# Altium PCB pcb_case_top_A_x1_1_5mm.PcbDoc
Units mm, origin at the board's own origin, x right, y up, seen from the top; angles counter-clockwise.
Board outline 46.89 x 20.32 mm, 2 copper layers (Top Layer, Bottom Layer), stack 1.571 mm thick; 10 components, 10 nets, 34 pads, 0 vias.
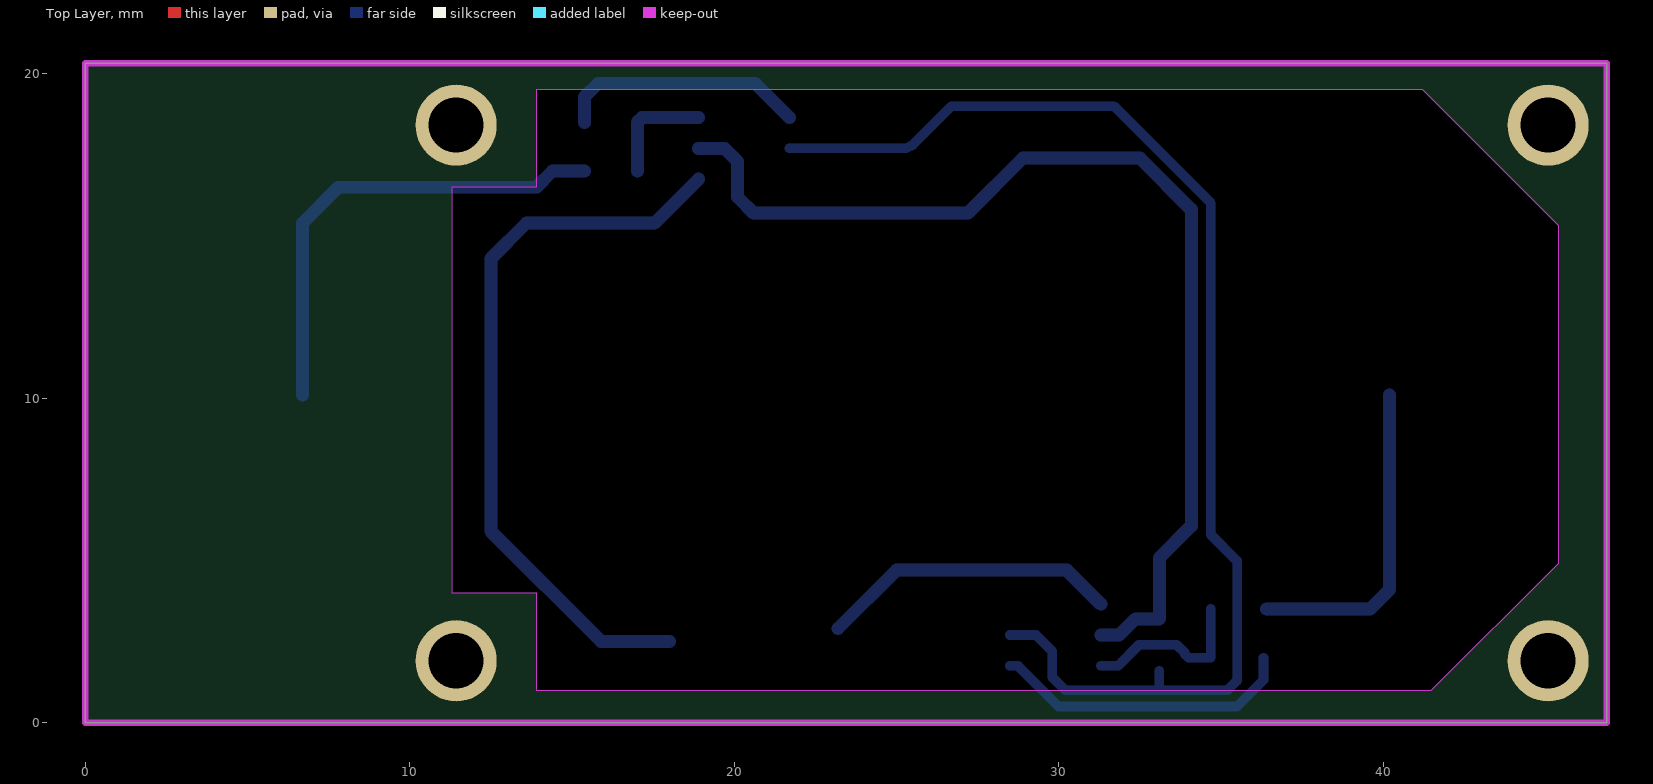
[diagram p0: Top Layer view]
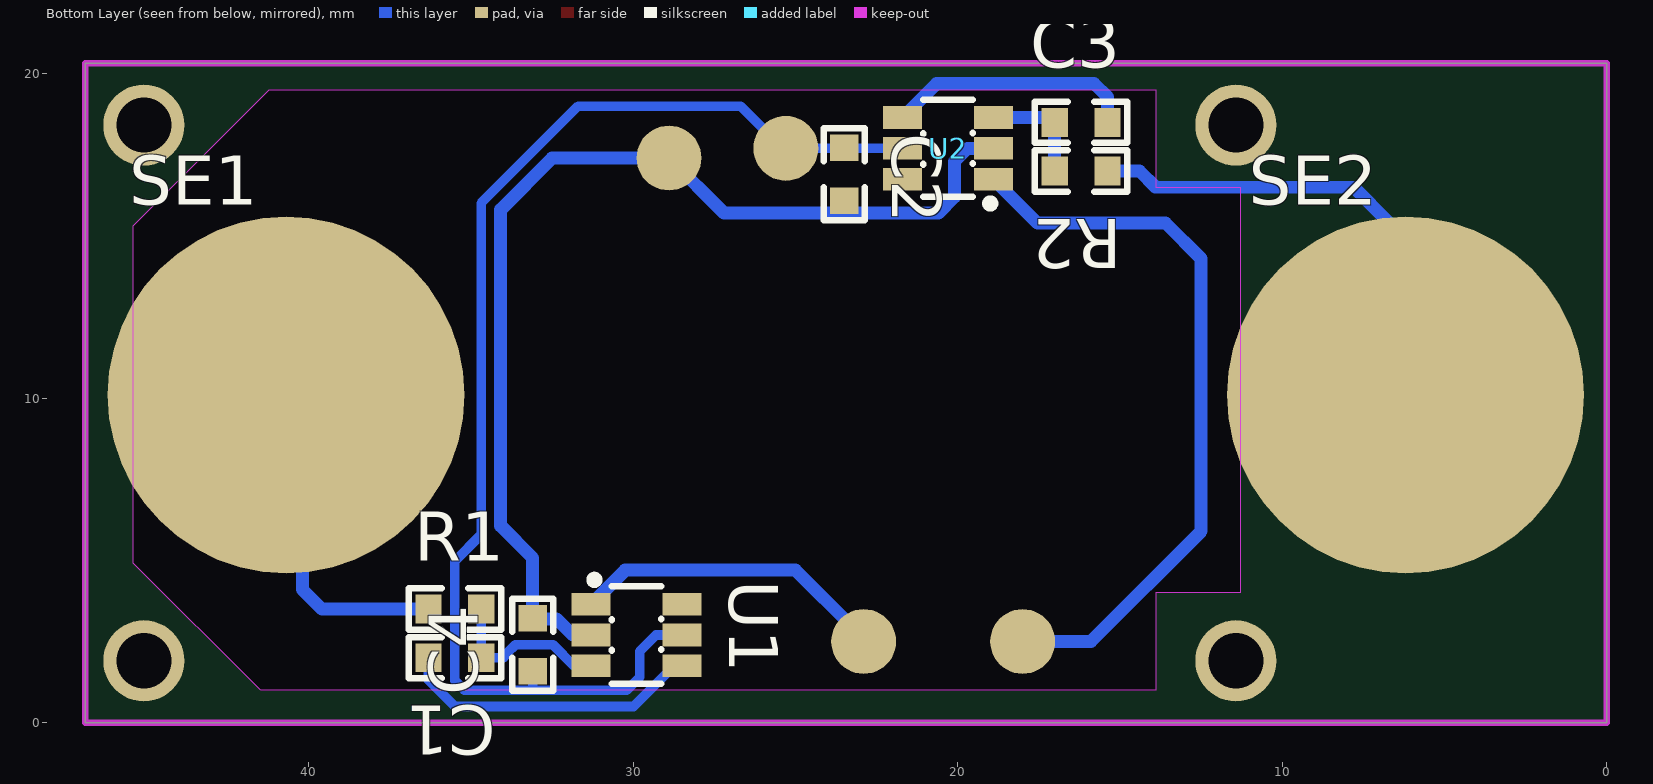
[diagram p1: Bottom Layer view, seen from below]
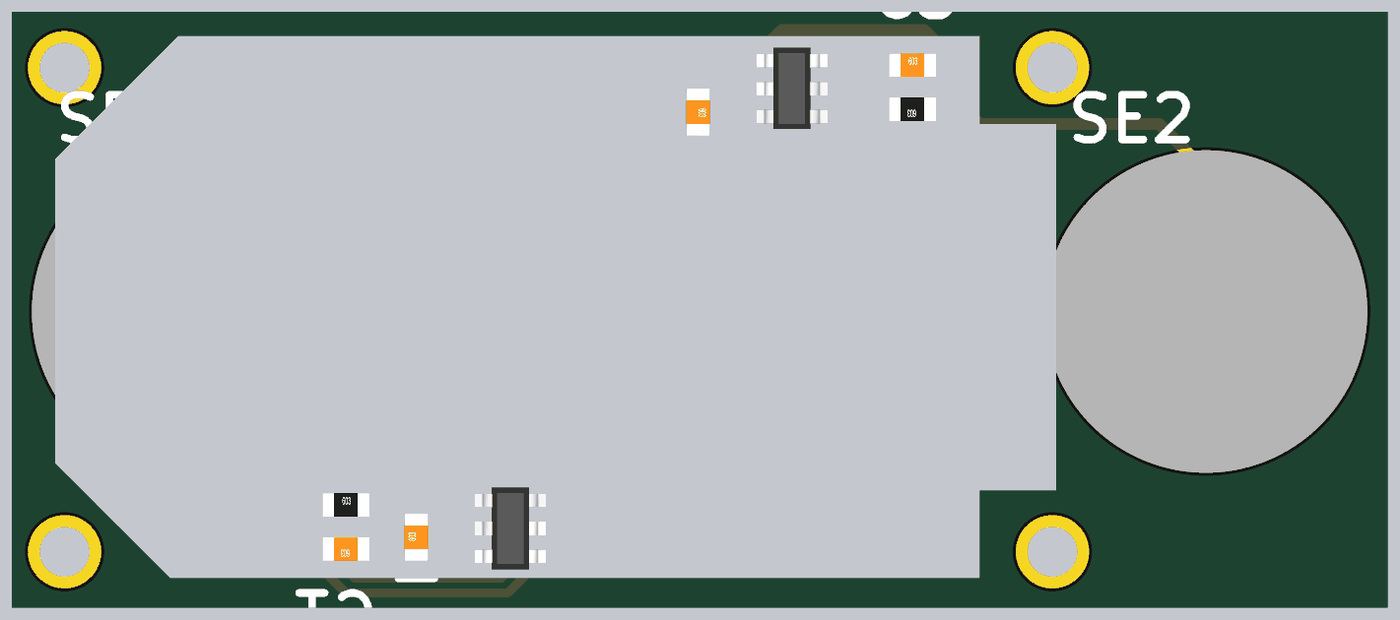
[diagram p2: 3D render of the assembled board from below, using the file's embedded part models]

## Layer stack, top to bottom
Top Solder: solder mask 0.0102, Solder Resist, Dk 3.5
Top Layer: signal copper 0.0356
Dielectric1: dielectric 1.5, FR-4, Dk 4.8
Bottom Layer: signal copper 0.0356
Bottom Solder: solder mask 0.0102, Solder Resist, Dk 3.5

## Board outline
0,0 46.89,0 46.89,20.32 0,20.32
cut-out: 11.3,4 13.9,4 13.9,1 41.49,1 45.405,4.915 45.405,15.315 41.22,19.5 13.9,19.5 13.9,16.5 11.3,16.5

## Design rules (kind name [scope] priority, off if disabled: settings)
Clearance [All] p1: gap=0.2
FabricationTestPointUsage TestPointUsage [All] p1: valid=0 allowmultiple=FALSE
FabricationTestpoint Testpoint [All] p1: side=3 testpointundercomponent=TRUE minsize=1.016 maxsize=2.54 preferedsize=1.524 minholesize=0 maxholesize=1.016 preferedholesize=0.813 testpointgrid=0.025 allowsidetop=TRUE allowsidebottom=TRUE usegrid=TRUE gridtolerance=0
PolygonConnect [All] p1: connectstyle=Relief reliefconductorwidth=0.4 reliefentries=4 polygonreliefangle="90 Angle" airgapwidth=0.3
RoomDefinition sch_qtouch [InComponentClass('sch_qtouch')] p1: confinementstyle=ConfineIn formatcopy=TRUE lockcomponents=FALSE outline -63.5,-34.646 179.172,-34.646 179.172,57.963 -63.5,57.963
RoutingVias [All] p1: holewidth=0.711 width=1.27 viastyle="Through Hole" minholewidth=0.711 minwidth=1.27 maxholewidth=0.711 maxwidth=1.27
SolderMaskExpansion [All] p1: expansion=0.102
Width [All] p1: maxlimit=0.4 minlimit=0.25 preferedwidth=0.4 minimp=50.000000 maximp=50.000000 favimp=50.000000
28 further rules are at their usual default settings.

## Components (designator, comment, footprint, x,y, rotation, side; value= is the part's Value field where it differs from the comment)
C1 "2n2" C0603 35.5,2 r0 bottom
C2 "100n" C0603 23.5,16.9 r270 bottom
C3 "2n2" C0603 16.2,18.5 r180 bottom
C4 "100n" C0603 33.1,2.4 r90 bottom
R1 "10k" R0603 35.5,3.5 r180 bottom
R2 "10k" R0603 16.2,17 r0 bottom
SE1 "Sense Electrode" SNS_EL_CIRC_1cm 40.7,10.1 r180 bottom
SE2 "Sense Electrode" SNS_EL_CIRC_1cm 6.2,10.1 r180 bottom
U1 "AT42QT1010-TSHR" SOT-23-6 29.9,2.7 r270 bottom
U2 "AT42QT1010-TSHR" SOT-23-6 20.3,17.7 r90 bottom

## Footprints (in the part's own frame and the unit in brackets; to place one, negate y for a bottom-side part, rotate by r counter-clockwise, add the part's x,y. Pads: shape width x height; smd on the part's side, far side on the other; paste and mask are expansions set on the pad)
C0603 [mil]
  rect 32x35 smd: 1(32,0) 2(-32,0)
  silkscreen extent -56,-25 56,25, body extent -31,-16 31,16, height 12
R0603 [mil]
  rect 32x35 smd: 1(32,0) 2(-32,0)
  silkscreen extent -56,-25 56,25, body extent -31,-16 31,16, height 12
SNS_EL_CIRC_1cm [mm] "Sense Electrode, Circle, 1cm Diameter"
  round 11 smd: 1(0,0)
SOT-23-6 [mm] ", AKA: SOT753 (NXP), TSOP5 (NXP)"
  rect 0.7x1.2 smd: 1(-0.95,-1.4) 2(0,-1.4) 3(0.95,-1.4) 4(0.95,1.4) 5(0,1.4) 6(-0.95,1.4)
  silkscreen extent -1.82,-1.43 1.5,0.76, body extent -1.4,-1.21 1.4,1.21, height 1.09

## Part data
C1 C2 C3 C4: library part Cap, "Capacitor"
R1 R2: library part Res, "Resistor"
SE1 SE2: library part _SNS_EL_CIRC_1cm, "Circular (1cm Diameter) Sense Electrode"
U1 U2: "Atmel Single-key QTouch Touch Sensor IC"

## Free pads (board coordinates)
  round 2 smd far side: 1(18,2.5) 1(22.9,2.5) 1(25.3,17.7) 1(28.9,17.4)
  round 2.5 hole 1.7: 4(11.43,1.905) 4(11.43,18.415) 4(45.085,1.905) 4(45.085,18.415)

## Nets (pads, with @x,y where several pads share a name; then routed paths per layer and width w, separated by ;. In a path a pad name is that pad's centre, name@x,y a point inside that pad or via, vN(x,y) a via of type N, cw(c..) or ccw(c..) an arc to the next point about the centre after c; other vN are vias at no path point)
GND: C2.1 C4.1 pad.1@28.9,17.4 U1.2 U2.2 | length 33
  Bottom Layer w0.4: U2.2 19.7,17.7 20.1,17.3 20.1,16.2 20.6,15.7 27.2,15.7 28.9,17.4 32.5,17.4 34.09,15.81 34.09,6.064 33.1,5.074 C4.1 33.087,3.2 32.366,3.2 31.866,2.7 U1.2
NetC1_1: C1.1 U1.4 | length 9.4
  Bottom Layer w0.3: U1.4 28.743,1.75 29.993,0.5 35.5,0.5 36.313,1.313 C1.1
NetC1_2: C1.2 R1.1 U1.3 | length 5.3
  Bottom Layer w0.3: U1.3 31.828,1.75 32.478,2.4 33.633,2.4 33.894,2.139 33.894,2.106 34,2 C1.2 R1.1
NetC3_1: C3.1 U2.4 | length 7.7
  Bottom Layer w0.4: C3.1 15.387,19.287 15.8,19.7 20.65,19.7 U2.4
NetC3_2: C3.2 R2.1 U2.3 | length 3.4
  Bottom Layer w0.4: R2.1 C3.2 17.163,18.65 U2.3
NetR1_2: R1.2 SE1.1 | length 10
  Bottom Layer w0.4: R1.2@36.4,3.5 39.6,3.5 40.2,4.1 SE1.1@40.2,10.1
NetR2_2: R2.2 SE2.1 | length 14.6
  Bottom Layer w0.4: SE2.1@6.7,10.1 6.7,15.4 7.8,16.5 13.9,16.5 14.4,17 R2.2
OUT1: pad.1@22.9,2.5 U1.1 | length 9.3
  Bottom Layer w0.4: pad.1@23.2,2.9 25,4.7 30.25,4.7 U1.1
OUT2: pad.1@18,2.5 U2.1 | length 22.7
  Bottom Layer w0.4: pad.1@18,2.5 15.9,2.5 12.5,5.9 12.5,14.3 13.6,15.4 17.55,15.4 U2.1
VCC: C2.2 C4.2 pad.1@25.3,17.7 U1.5 U2.5 | length 38.7
  Bottom Layer w0.3: U2.5 25.3,17.7 25.5,17.8 26.7,19 31.7,19 34.69,16.01 34.69,5.79 35.5,4.98 35.5,1.3 35.2,1 33.1,1 ; U1.5 29.3,2.7 29.8,2.2 29.8,1.4 30.2,1 33.1,1 ; C4.2 33.1,1
pads on no net: U1.6 U2.6

## Keep-outs
Keep-Out Layer:
  lines w0.2: 0,0 0,20.32 9.09,20.32 46.89,20.32 46.89,0 9.09,0 0,0

## Silkscreen, mask and mechanical layers (free items; w line width, h text height)
Mechanical 3:
  lines w0.2: 11.3,4 11.3,16.5 13.9,16.5 13.9,19.5 41.22,19.5 45.405,15.315 45.405,4.915 41.49,1 13.9,1 13.9,4 11.3,4
Mechanical 16:
  lines w0.127: -112.27,-43.27 -107.19,-43.27 ; -112.27,4.99 -107.19,4.99 ; -112.27,53.25 -107.19,53.25 ; -39.245,-91.53 -39.245,-86.45 ; -39.245,96.43 -39.245,101.51 ; 24.89,-86.45 60.45,-86.45 174.75,-86.45 ; 33.78,-91.53 33.78,-86.45 ; 33.78,96.43 33.78,101.51 ; 54.837,-86.425 54.862,-86.45 ; 69.672,-86.436 69.672,-63.348 174.743,-63.348 ; 69.698,-70.866 174.717,-70.866 ; 69.723,-78.842 174.717,-78.842 ; 88.653,-86.436 88.653,-78.842 ; 88.673,-82.855 174.717,-82.855 ; 106.805,-91.53 106.805,-86.45 ; 106.805,96.43 106.805,101.51 ; 120.193,-86.385 120.193,-78.867 ; 149.123,-78.842 149.123,-63.348 ; 164.148,-70.866 164.148,-63.351 ; 174.75,-43.27 179.83,-43.27 ; 174.75,4.99 179.83,4.99 ; 174.75,53.25 179.83,53.25 ; 174.75,-86.45 174.75,-61.177 174.75,96.43 -107.19,96.43 -107.19,-86.45 174.75,-86.45 ; -112.27,-91.53 -112.27,101.51 179.83,101.51 179.83,-91.53 -112.27,-91.53
  text "1" at -76.024,98.081 h1.78
  text "2" at -3.38,98.081 h1.78
  text "3" at 69.772,98.081 h1.78
  text "4" at 142.67,98.081 h1.78
  text "A" at -110.365,75.069 h1.78
  text "A" at 176.655,75.069 h1.78
  text "B" at -110.365,27.012 h1.78
  text "B" at 176.655,27.012 h1.78
  text "C" at -110.365,-21.502 h1.78
  text "C" at 176.655,-21.502 h1.78
  text "PROJECT NAME:" at 70.587,-65.354 h1.14
  text "REVISION:" at 150.037,-65.354 h1.14
  text "A4" at 167.498,-68.426 h2.29
  text "Project_Name" at 95.173,-68.758 h2.54
  text "0.0.0" at 153.323,-69.201 h1.78
  text "D" at -110.365,-69.508 h1.78
  text "D" at 176.655,-69.508 h1.78
  text "PROJECT NUMBER:" at 150.012,-72.873 h1.14
  text "TITLE:" at 70.561,-72.949 h1.14
  text "PCB_TITLE" at 100.38,-76.911 h2.16
  text "ONW-000" at 157.498,-77.05 h1.78
  text "DATE:" at 70.688,-81.051 h1.14
  text "NAME_1" at 138.456,-81.535 h1.52
  text "X" at 99.875,-81.61 h1.52
  text "DRAWN BY:" at 121.26,-81.611 h1.52
  text "of" at 103.558,-81.686 h1.52
  text "Y" at 107.978,-81.686 h1.52
  text "SHEET" at 90.096,-81.712 h1.52
  text "DD-MM-YYYY" at 71.857,-85.166 h1.52
  text "NAME_2" at 138.482,-85.167 h1.52
  text "CHECKED BY:" at 121.235,-85.294 h1.52
  text ".PCB_FILE_NAME_NO_PATH" at 89.995,-85.319 h1.52
  text "1" at -76.024,-89.879 h1.78
  text "2" at -3.38,-89.879 h1.78
  text "3" at 69.772,-89.879 h1.78
  text "4" at 142.67,-89.879 h1.78